# EAGLE board mav_nus_breakout_4xmulti (EAGLE 7.7.0)
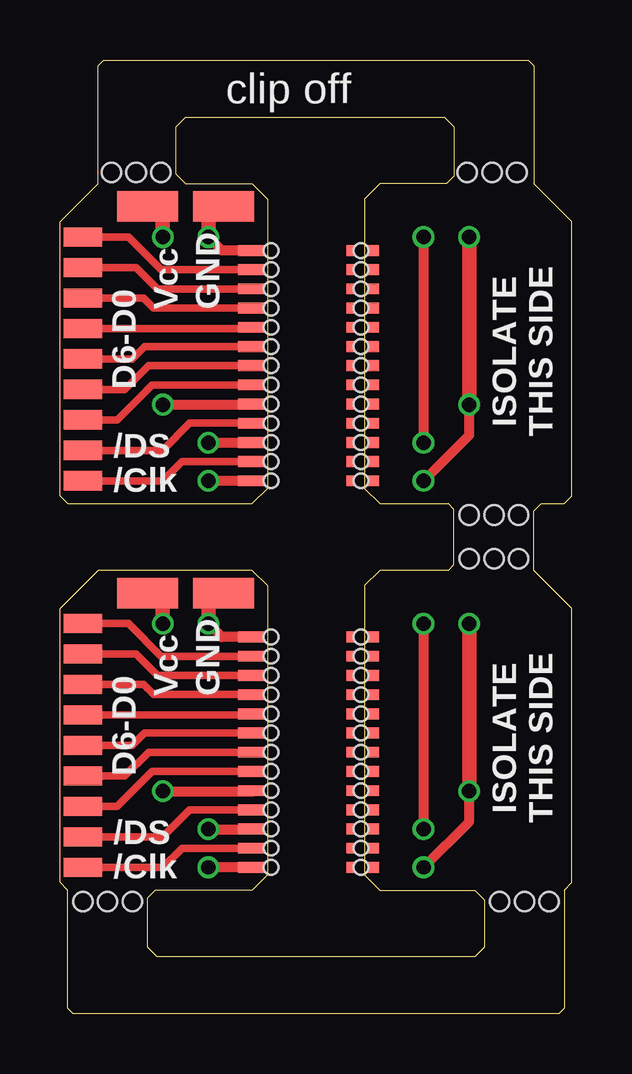
[diagram p0: board, top side]
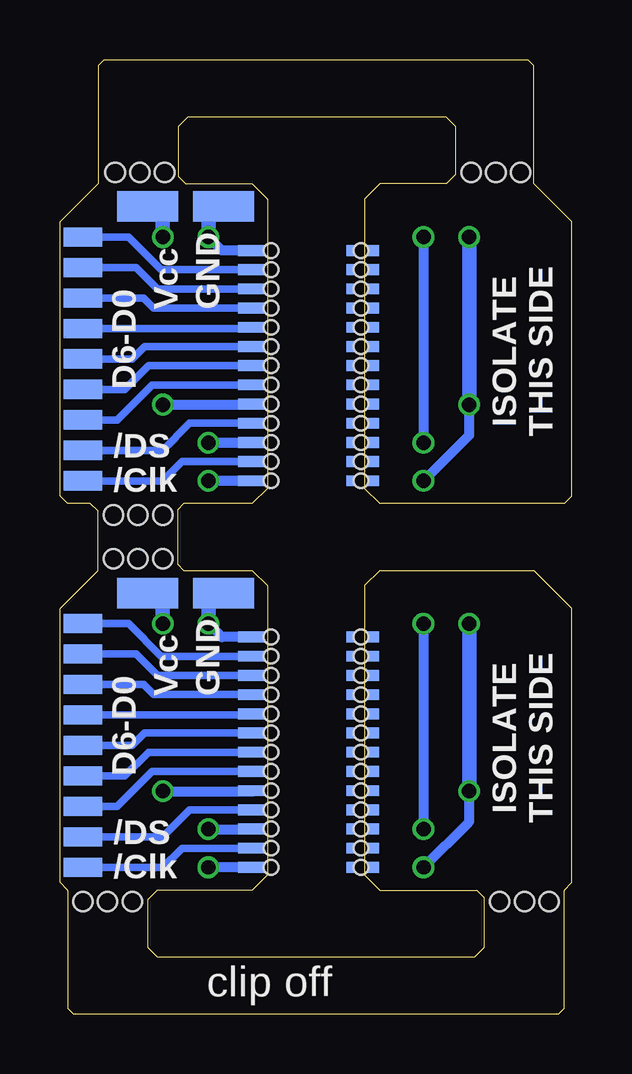
[diagram p1: board, bottom side, seen from below]

Size 21.35 x 39.77 mm. Coordinates in mm from the lower left corner, seen from the top.
Outline: 0,5.48 0,16.91 1.59,18.49 8.02,18.49 8.65,17.86 8.65,5.79 8.02,5.16 3.97,5.16 3.65,4.84 3.65,2.78 4.05,2.38 17.3,2.38 17.7,2.78 17.7,4.76 17.3,5.16 13.34,5.16 12.7,5.79 12.7,17.86 13.34,18.49 16.19,18.49 16.43,18.73 16.43,21.03 16.19,21.27 13.34,21.27 12.7,21.91 12.7,33.97 13.34,34.61 16.11,34.61 16.43,34.93 16.43,36.99 16.03,37.39 5.24,37.39 4.84,36.99 4.84,35 5.24,34.61 8.02,34.61 8.65,33.97 8.65,21.91 8.02,21.27 0.32,21.27 0,21.59 0,33.02 1.59,34.61 1.59,39.53 1.83,39.77 19.53,39.77 19.76,39.53 19.76,34.61 21.35,33.02 21.35,21.59 21.03,21.27 20.08,21.27 19.76,20.96 19.76,18.49 21.35,16.91 21.35,5.48 21.03,5.16 21.03,0.24 20.8,0 0.56,0 0.32,0.24 0.32,5.16 0,5.48
Copper layers (1*16): Top 0.035mm / dielectric 1.5mm / Bottom 0.035mm
Design rules "ITEADstudio_DRC": minimum track width 6mil, minimum drill 12mil, track to track 6mil, track to pad 6mil, pad to pad 6mil, via to via 6mil, smd to smd 0mil, copper to edge 10mil, drill to drill 10mil, minimum pad ring 10mil, minimum via ring 6mil, stop-mask expansion 2mil, vias tented up to drill 30mil, thermal gap 10mil
Holes 0.6 mm at 8.8,6.11 8.8,6.91 8.8,7.71 8.8,8.51 8.8,9.31 8.8,10.11 8.8,10.91 8.8,11.71 8.8,12.51 8.8,13.31 8.8,14.11 8.8,14.91 8.8,15.71 12.56,6.11 12.56,6.91 12.56,7.71 12.56,8.51 12.56,9.31 12.56,10.11 12.56,10.91 12.56,11.71 12.56,12.51 12.56,13.31 12.56,14.11 12.56,14.91 12.56,15.71 8.8,22.23 8.8,23.03 8.8,23.82 8.8,24.62 8.8,25.43 8.8,26.23 8.8,27.03 8.8,27.82 8.8,28.62 8.8,29.43 8.8,30.23 8.8,31.03 8.8,31.82 12.56,22.23 12.56,23.03 12.56,23.82 12.56,24.62 12.56,25.43 12.56,26.23 12.56,27.03 12.56,27.82 12.56,28.62 12.56,29.43 12.56,30.23 12.56,31.03 12.56,31.82
Holes 0.8 mm at 0.95,4.68 3.02,4.68 1.98,4.68 18.34,4.68 20.4,4.68 19.37,4.68 17.07,20.8 19.13,20.8 18.1,20.8 17.07,18.97 19.13,18.97 18.1,18.97 2.14,35.08 4.21,35.08 3.17,35.08 16.99,35.08 19.05,35.08 18.02,35.08

## Footprints (pad centres in the part's own frame; a part is rotated, then mirrored left to right if it is on the bottom)
SMD1,27-2,54 = smd 1.27 x 2.54: 1 0,0
SMD0,45-1,35 = smd 1.35 x 0.45: P$1 0,0
SMD0,8-1,6 = smd 0.8 x 1.6: P$1 0,0

## Placement (x,y rotation side)
PAD1  [SMD1,27-2,54]  3.65,17.54 270 top
PAD2  [SMD1,27-2,54]  6.83,17.54 270 top
PAD3  [SMD1,27-2,54]  17.7,17.54 270 bottom
PAD4  [SMD1,27-2,54]  14.53,17.54 270 bottom
PAD5  [SMD1,27-2,54]  3.65,33.66 270 top
PAD6  [SMD1,27-2,54]  6.83,33.66 270 top
PAD7  [SMD1,27-2,54]  17.7,33.66 270 bottom
PAD8  [SMD1,27-2,54]  14.53,33.66 270 bottom
U$1  SMD0,45  [SMD0,45-1,35]  8.1,10.91 0 top
U$2  SMD0,45  [SMD0,45-1,35]  8.1,10.11 0 top
U$3  SMD0,45  [SMD0,45-1,35]  8.1,8.51 0 top
U$4  SMD0,45  [SMD0,45-1,35]  8.1,6.91 0 top
U$5  SMD0,45  [SMD0,45-1,35]  8.1,11.71 0 top
U$6  SMD0,45  [SMD0,45-1,35]  8.1,12.51 0 top
U$7  SMD0,45  [SMD0,45-1,35]  8.1,13.31 0 top
U$8  SMD0,45  [SMD0,45-1,35]  8.1,14.11 0 top
U$9  SMD0,45  [SMD0,45-1,35]  8.1,14.91 0 top
U$10  SMD0,45  [SMD0,45-1,35]  8.1,9.31 0 top
U$11  SMD0,45  [SMD0,45-1,35]  8.1,6.11 0 top
U$12  SMD0,45  [SMD0,45-1,35]  8.1,7.71 0 top
U$13  SMD0,45  [SMD0,45-1,35]  8.1,15.71 0 top
U$14  SMD1  [SMD0,8-1,6]  0.95,9.92 90 top
U$15  SMD1  [SMD0,8-1,6]  0.95,8.65 90 top
U$16  SMD1  [SMD0,8-1,6]  0.95,7.38 90 top
U$17  SMD1  [SMD0,8-1,6]  0.95,6.11 90 top
U$18  SMD1  [SMD0,8-1,6]  0.95,11.19 90 top
U$19  SMD1  [SMD0,8-1,6]  0.95,12.46 90 top
U$20  SMD1  [SMD0,8-1,6]  0.95,13.73 90 top
U$21  SMD1  [SMD0,8-1,6]  0.95,15 90 top
U$22  SMD1  [SMD0,8-1,6]  0.95,16.27 90 top
U$23  SMD0,45  [SMD0,45-1,35]  8.73,6.11 0 bottom
U$24  SMD0,45  [SMD0,45-1,35]  8.73,15.71 0 bottom
U$25  SMD0,45  [SMD0,45-1,35]  8.73,14.91 0 bottom
U$26  SMD0,45  [SMD0,45-1,35]  8.73,14.11 0 bottom
U$27  SMD0,45  [SMD0,45-1,35]  8.73,13.31 0 bottom
U$28  SMD0,45  [SMD0,45-1,35]  8.73,12.51 0 bottom
U$29  SMD0,45  [SMD0,45-1,35]  8.73,11.71 0 bottom
U$30  SMD0,45  [SMD0,45-1,35]  8.73,10.91 0 bottom
U$31  SMD0,45  [SMD0,45-1,35]  8.73,10.11 0 bottom
U$32  SMD0,45  [SMD0,45-1,35]  8.73,9.31 0 bottom
U$33  SMD0,45  [SMD0,45-1,35]  8.73,8.51 0 bottom
U$34  SMD0,45  [SMD0,45-1,35]  8.73,7.71 0 bottom
U$35  SMD0,45  [SMD0,45-1,35]  8.73,6.91 0 bottom
U$36  SMD0,45  [SMD0,45-1,35]  13.26,10.91 0 bottom
U$37  SMD0,45  [SMD0,45-1,35]  13.26,9.31 0 bottom
U$38  SMD0,45  [SMD0,45-1,35]  13.26,6.11 0 bottom
U$39  SMD0,45  [SMD0,45-1,35]  13.26,7.71 0 bottom
U$40  SMD0,45  [SMD0,45-1,35]  13.26,15.71 0 bottom
U$41  SMD1  [SMD0,8-1,6]  20.4,9.92 90 bottom
U$42  SMD1  [SMD0,8-1,6]  20.4,8.65 90 bottom
U$43  SMD1  [SMD0,8-1,6]  20.4,7.38 90 bottom
U$44  SMD1  [SMD0,8-1,6]  20.4,6.11 90 bottom
U$45  SMD1  [SMD0,8-1,6]  20.4,11.19 90 bottom
U$46  SMD1  [SMD0,8-1,6]  20.4,12.46 90 bottom
U$47  SMD0,45  [SMD0,45-1,35]  13.26,10.11 0 bottom
U$48  SMD1  [SMD0,8-1,6]  20.4,13.73 90 bottom
U$49  SMD1  [SMD0,8-1,6]  20.4,15 90 bottom
U$50  SMD1  [SMD0,8-1,6]  20.4,16.27 90 bottom
U$51  SMD0,45  [SMD0,45-1,35]  13.26,8.51 0 bottom
U$52  SMD0,45  [SMD0,45-1,35]  13.26,6.91 0 bottom
U$53  SMD0,45  [SMD0,45-1,35]  13.26,11.71 0 bottom
U$54  SMD0,45  [SMD0,45-1,35]  13.26,12.51 0 bottom
U$55  SMD0,45  [SMD0,45-1,35]  13.26,13.31 0 bottom
U$56  SMD0,45  [SMD0,45-1,35]  13.26,14.11 0 bottom
U$57  SMD0,45  [SMD0,45-1,35]  13.26,14.91 0 bottom
U$58  SMD0,45  [SMD0,45-1,35]  12.62,6.11 0 top
U$59  SMD0,45  [SMD0,45-1,35]  12.62,15.71 0 top
U$60  SMD0,45  [SMD0,45-1,35]  12.62,14.91 0 top
U$61  SMD0,45  [SMD0,45-1,35]  12.62,14.11 0 top
U$62  SMD0,45  [SMD0,45-1,35]  12.62,13.31 0 top
U$63  SMD0,45  [SMD0,45-1,35]  12.62,12.51 0 top
U$64  SMD0,45  [SMD0,45-1,35]  12.62,11.71 0 top
U$65  SMD0,45  [SMD0,45-1,35]  12.62,10.91 0 top
U$66  SMD0,45  [SMD0,45-1,35]  12.62,10.11 0 top
U$67  SMD0,45  [SMD0,45-1,35]  12.62,9.31 0 top
U$68  SMD0,45  [SMD0,45-1,35]  12.62,8.51 0 top
U$69  SMD0,45  [SMD0,45-1,35]  12.62,7.71 0 top
U$70  SMD0,45  [SMD0,45-1,35]  12.62,6.91 0 top
U$71  SMD0,45  [SMD0,45-1,35]  8.1,27.03 0 top
U$72  SMD0,45  [SMD0,45-1,35]  8.1,25.43 0 top
U$73  SMD0,45  [SMD0,45-1,35]  8.1,22.23 0 top
U$74  SMD0,45  [SMD0,45-1,35]  8.1,23.82 0 top
U$75  SMD0,45  [SMD0,45-1,35]  8.1,31.82 0 top
U$76  SMD1  [SMD0,8-1,6]  0.95,26.04 90 top
U$77  SMD1  [SMD0,8-1,6]  0.95,24.77 90 top
U$78  SMD1  [SMD0,8-1,6]  0.95,23.5 90 top
U$79  SMD1  [SMD0,8-1,6]  0.95,22.23 90 top
U$80  SMD1  [SMD0,8-1,6]  0.95,27.3 90 top
U$81  SMD1  [SMD0,8-1,6]  0.95,28.57 90 top
U$82  SMD0,45  [SMD0,45-1,35]  8.1,26.23 0 top
U$83  SMD1  [SMD0,8-1,6]  0.95,29.85 90 top
U$84  SMD1  [SMD0,8-1,6]  0.95,31.12 90 top
U$85  SMD1  [SMD0,8-1,6]  0.95,32.38 90 top
U$86  SMD0,45  [SMD0,45-1,35]  8.1,24.62 0 top
U$87  SMD0,45  [SMD0,45-1,35]  8.1,23.03 0 top
U$88  SMD0,45  [SMD0,45-1,35]  8.1,27.82 0 top
U$89  SMD0,45  [SMD0,45-1,35]  8.1,28.62 0 top
U$90  SMD0,45  [SMD0,45-1,35]  8.1,29.43 0 top
U$91  SMD0,45  [SMD0,45-1,35]  8.1,30.23 0 top
U$92  SMD0,45  [SMD0,45-1,35]  8.1,31.03 0 top
U$93  SMD0,45  [SMD0,45-1,35]  8.73,22.23 0 bottom
U$94  SMD0,45  [SMD0,45-1,35]  8.73,31.82 0 bottom
U$95  SMD0,45  [SMD0,45-1,35]  8.73,31.03 0 bottom
U$96  SMD0,45  [SMD0,45-1,35]  8.73,30.23 0 bottom
U$97  SMD0,45  [SMD0,45-1,35]  8.73,29.43 0 bottom
U$98  SMD0,45  [SMD0,45-1,35]  8.73,28.62 0 bottom
U$99  SMD0,45  [SMD0,45-1,35]  8.73,27.82 0 bottom
U$100  SMD0,45  [SMD0,45-1,35]  8.73,27.03 0 bottom
U$101  SMD0,45  [SMD0,45-1,35]  8.73,26.23 0 bottom
U$102  SMD0,45  [SMD0,45-1,35]  8.73,25.43 0 bottom
U$103  SMD0,45  [SMD0,45-1,35]  8.73,24.62 0 bottom
U$104  SMD0,45  [SMD0,45-1,35]  8.73,23.82 0 bottom
U$105  SMD0,45  [SMD0,45-1,35]  8.73,23.03 0 bottom
U$106  SMD0,45  [SMD0,45-1,35]  13.26,27.03 0 bottom
U$107  SMD0,45  [SMD0,45-1,35]  13.26,25.43 0 bottom
U$108  SMD0,45  [SMD0,45-1,35]  13.26,22.23 0 bottom
U$109  SMD0,45  [SMD0,45-1,35]  13.26,23.82 0 bottom
U$110  SMD0,45  [SMD0,45-1,35]  13.26,31.82 0 bottom
U$111  SMD1  [SMD0,8-1,6]  20.4,26.04 90 bottom
U$112  SMD1  [SMD0,8-1,6]  20.4,24.77 90 bottom
U$113  SMD1  [SMD0,8-1,6]  20.4,23.5 90 bottom
U$114  SMD1  [SMD0,8-1,6]  20.4,22.23 90 bottom
U$115  SMD1  [SMD0,8-1,6]  20.4,27.3 90 bottom
U$116  SMD1  [SMD0,8-1,6]  20.4,28.57 90 bottom
U$117  SMD0,45  [SMD0,45-1,35]  13.26,26.23 0 bottom
U$118  SMD1  [SMD0,8-1,6]  20.4,29.85 90 bottom
U$119  SMD1  [SMD0,8-1,6]  20.4,31.12 90 bottom
U$120  SMD1  [SMD0,8-1,6]  20.4,32.38 90 bottom
U$121  SMD0,45  [SMD0,45-1,35]  13.26,24.62 0 bottom
U$122  SMD0,45  [SMD0,45-1,35]  13.26,23.03 0 bottom
U$123  SMD0,45  [SMD0,45-1,35]  13.26,27.82 0 bottom
U$124  SMD0,45  [SMD0,45-1,35]  13.26,28.62 0 bottom
U$125  SMD0,45  [SMD0,45-1,35]  13.26,29.43 0 bottom
U$126  SMD0,45  [SMD0,45-1,35]  13.26,30.23 0 bottom
U$127  SMD0,45  [SMD0,45-1,35]  13.26,31.03 0 bottom
U$128  SMD0,45  [SMD0,45-1,35]  12.62,22.23 0 top
U$129  SMD0,45  [SMD0,45-1,35]  12.62,31.82 0 top
U$130  SMD0,45  [SMD0,45-1,35]  12.62,31.03 0 top
U$131  SMD0,45  [SMD0,45-1,35]  12.62,30.23 0 top
U$132  SMD0,45  [SMD0,45-1,35]  12.62,29.43 0 top
U$133  SMD0,45  [SMD0,45-1,35]  12.62,28.62 0 top
U$134  SMD0,45  [SMD0,45-1,35]  12.62,27.82 0 top
U$135  SMD0,45  [SMD0,45-1,35]  12.62,27.03 0 top
U$136  SMD0,45  [SMD0,45-1,35]  12.62,26.23 0 top
U$137  SMD0,45  [SMD0,45-1,35]  12.62,25.43 0 top
U$138  SMD0,45  [SMD0,45-1,35]  12.62,24.62 0 top
U$139  SMD0,45  [SMD0,45-1,35]  12.62,23.82 0 top
U$140  SMD0,45  [SMD0,45-1,35]  12.62,23.03 0 top

## Library data of the parts
PAD1-PAD8 U$1-U$140 = wirepad

## Nets
N$1: U$1.P$1 U$14.P$1
N$2: U$2.P$1 U$15.P$1
N$3: U$3.P$1 U$16.P$1
N$4: U$4.P$1 U$17.P$1
N$5: U$5.P$1 U$18.P$1
N$6: U$6.P$1 U$19.P$1
N$7: U$7.P$1 U$20.P$1
N$8: U$8.P$1 U$21.P$1
N$9: U$9.P$1 U$22.P$1
N$10: PAD1.1 U$10.P$1 U$11.P$1
N$11: PAD2.1 U$12.P$1 U$13.P$1
N$12: U$36.P$1 U$41.P$1
N$13: U$42.P$1 U$47.P$1
N$14: U$43.P$1 U$51.P$1
N$15: U$44.P$1 U$52.P$1
N$16: U$45.P$1 U$53.P$1
N$17: U$46.P$1 U$54.P$1
N$18: U$48.P$1 U$55.P$1
N$19: U$49.P$1 U$56.P$1
N$20: U$50.P$1 U$57.P$1
N$21: PAD3.1 U$37.P$1 U$38.P$1
N$22: PAD4.1 U$39.P$1 U$40.P$1
N$23: U$71.P$1 U$76.P$1
N$24: U$77.P$1 U$82.P$1
N$25: U$78.P$1 U$86.P$1
N$26: U$79.P$1 U$87.P$1
N$27: U$80.P$1 U$88.P$1
N$28: U$81.P$1 U$89.P$1
N$29: U$83.P$1 U$90.P$1
N$30: U$84.P$1 U$91.P$1
N$31: U$85.P$1 U$92.P$1
N$32: PAD5.1 U$72.P$1 U$73.P$1
N$33: PAD6.1 U$74.P$1 U$75.P$1
N$34: U$106.P$1 U$111.P$1
N$35: U$112.P$1 U$117.P$1
N$36: U$113.P$1 U$121.P$1
N$37: U$114.P$1 U$122.P$1
N$38: U$115.P$1 U$123.P$1
N$39: U$116.P$1 U$124.P$1
N$40: U$118.P$1 U$125.P$1
N$41: U$119.P$1 U$126.P$1
N$42: U$120.P$1 U$127.P$1
N$43: PAD7.1 U$107.P$1 U$108.P$1
N$44: PAD8.1 U$109.P$1 U$110.P$1

## Tracks (layer width: path | path; a pad name or v marks a point on that pad's centre or on a via)
N$1
  Top 0.305: U$1.P$1 3.69,10.91 2.7,9.92 U$14.P$1
N$2
  Top 0.305: U$15.P$1 2.38,8.65 3.84,10.11 U$2.P$1
N$3
  Top 0.305: U$3.P$1 5.42,8.51 4.29,7.38 U$16.P$1
N$4
  Top 0.305: U$4.P$1 5.09,6.91 4.29,6.11 U$17.P$1
N$5
  Top 0.305: U$5.P$1 3.54,11.71 3.02,11.19 U$18.P$1
N$6
  Top 0.254: 8.05,12.46 U$6.P$1
  Top 0.305: U$19.P$1 8.05,12.46
N$7
  Top 0.305: U$7.P$1 3.91,13.31 3.49,13.73 U$20.P$1
N$8
  Top 0.305: U$8.P$1 4.07,14.11 3.17,15 U$21.P$1
N$9
  Top 0.305: U$9.P$1 4.22,14.91 2.86,16.27 U$22.P$1
N$10  (via drill 0.6)
  Top 0.356: 8.07,9.29 U$10.P$1
  Top 0.406: U$11.P$1 v6.19,6.11 | v4.29,9.29 8.07,9.29 | 4.29,17.54 PAD1.1
  Top 0.61: v4.29,16.27 4.29,17.54
  Bottom 0.406: v6.19,6.11 4.29,8.02 v4.29,9.29
  Bottom 0.61: v4.29,9.29 v4.29,16.27
N$11  (via drill 0.6)
  Top 0.356: 8.08,7.7 U$12.P$1 | 6.19,17.54 PAD2.1
  Top 0.406: U$13.P$1 6.75,15.71 v6.19,16.27 | v6.19,7.7 8.08,7.7
  Top 0.61: v6.19,16.27 6.19,17.54
  Bottom 0.406: v6.19,16.27 v6.19,7.7
N$12
  Bottom 0.305: U$36.P$1 17.66,10.91 18.65,9.92 U$41.P$1
N$13
  Bottom 0.305: U$42.P$1 18.97,8.65 17.51,10.11 U$47.P$1
N$14
  Bottom 0.305: U$51.P$1 15.94,8.51 17.07,7.38 U$43.P$1
N$15
  Bottom 0.305: U$52.P$1 16.27,6.91 17.07,6.11 U$44.P$1
N$16
  Bottom 0.305: U$53.P$1 17.82,11.71 18.34,11.19 U$45.P$1
N$17
  Bottom 0.254: 13.31,12.46 U$54.P$1
  Bottom 0.305: U$46.P$1 13.31,12.46
N$18
  Bottom 0.305: U$55.P$1 17.44,13.31 17.86,13.73 U$48.P$1
N$19
  Bottom 0.305: U$56.P$1 17.29,14.11 18.18,15 U$49.P$1
N$20
  Bottom 0.305: U$57.P$1 17.13,14.91 18.49,16.27 U$50.P$1
N$21  (via drill 0.6)
  Top 0.406: v15.16,6.11 17.07,8.02 v17.07,9.29
  Top 0.61: v17.07,9.29 v17.07,16.27
  Bottom 0.356: 13.28,9.29 U$37.P$1
  Bottom 0.406: U$38.P$1 v15.16,6.11 | v17.07,9.29 13.28,9.29 | 17.07,17.54 PAD3.1
  Bottom 0.61: v17.07,16.27 17.07,17.54
N$22  (via drill 0.6)
  Top 0.406: v15.16,16.27 v15.16,7.7
  Bottom 0.356: U$39.P$1 | 15.16,17.54 PAD4.1
  Bottom 0.406: U$40.P$1 14.6,15.71 v15.16,16.27 | v15.16,7.7 U$39.P$1
  Bottom 0.61: v15.16,16.27 15.16,17.54
N$23
  Top 0.305: U$71.P$1 3.69,27.03 2.7,26.04 U$76.P$1
N$24
  Top 0.305: U$77.P$1 2.38,24.77 3.84,26.23 U$82.P$1
N$25
  Top 0.305: U$86.P$1 5.42,24.63 4.29,23.5 U$78.P$1
N$26
  Top 0.305: U$87.P$1 5.09,23.03 4.29,22.23 U$79.P$1
N$27
  Top 0.305: U$88.P$1 3.54,27.83 3.02,27.31 U$80.P$1
N$28
  Top 0.254: 8.05,28.58 U$89.P$1
  Top 0.305: U$81.P$1 8.05,28.58
N$29
  Top 0.305: U$90.P$1 3.91,29.43 3.49,29.85 U$83.P$1
N$30
  Top 0.305: U$91.P$1 4.07,30.23 3.17,31.12 U$84.P$1
N$31
  Top 0.305: U$92.P$1 4.22,31.03 2.86,32.39 U$85.P$1
N$32  (via drill 0.6)
  Top 0.356: 8.07,25.4 U$72.P$1
  Top 0.406: U$73.P$1 v6.19,22.23 | v4.29,25.4 8.07,25.4 | 4.29,33.66 PAD5.1
  Top 0.61: v4.29,32.39 4.29,33.66
  Bottom 0.406: v6.19,22.23 4.29,24.13 v4.29,25.4
  Bottom 0.61: v4.29,25.4 v4.29,32.39
N$33  (via drill 0.6)
  Top 0.356: 8.08,23.81 U$74.P$1 | 6.19,33.66 PAD6.1
  Top 0.406: U$75.P$1 6.75,31.83 v6.19,32.39 | v6.19,23.81 8.08,23.81
  Top 0.61: v6.19,32.39 6.19,33.66
  Bottom 0.406: v6.19,32.39 v6.19,23.81
N$34
  Bottom 0.305: U$106.P$1 17.66,27.03 18.65,26.04 U$111.P$1
N$35
  Bottom 0.305: U$112.P$1 18.97,24.77 17.51,26.23 U$117.P$1
N$36
  Bottom 0.305: U$121.P$1 15.94,24.63 17.07,23.5 U$113.P$1
N$37
  Bottom 0.305: U$122.P$1 16.27,23.03 17.07,22.23 U$114.P$1
N$38
  Bottom 0.305: U$123.P$1 17.82,27.83 18.34,27.31 U$115.P$1
N$39
  Bottom 0.254: 13.31,28.58 U$124.P$1
  Bottom 0.305: U$116.P$1 13.31,28.58
N$40
  Bottom 0.305: U$125.P$1 17.44,29.43 17.86,29.85 U$118.P$1
N$41
  Bottom 0.305: U$126.P$1 17.29,30.23 18.18,31.12 U$119.P$1
N$42
  Bottom 0.305: U$127.P$1 17.13,31.03 18.49,32.39 U$120.P$1
N$43  (via drill 0.6)
  Top 0.406: v15.16,22.23 17.07,24.13 v17.07,25.4
  Top 0.61: v17.07,25.4 v17.07,32.39
  Bottom 0.356: 13.28,25.4 U$107.P$1
  Bottom 0.406: U$108.P$1 v15.16,22.23 | v17.07,25.4 13.28,25.4 | 17.07,33.66 PAD7.1
  Bottom 0.61: v17.07,32.39 17.07,33.66
N$44  (via drill 0.6)
  Top 0.406: v15.16,32.39 v15.16,23.81
  Bottom 0.356: 13.27,23.81 U$109.P$1 | 15.16,33.66 PAD8.1
  Bottom 0.406: U$110.P$1 14.6,31.83 v15.16,32.39 | v15.16,23.81 13.27,23.81
  Bottom 0.61: v15.16,32.39 15.16,33.66

## Text on the board
tNames: clip off | Vcc | GND | ISOLATE / THIS SIDE | D6-D0 | /DS | /Clk | Vcc | GND | ISOLATE / THIS SIDE | D6-D0 | /DS | /Clk
bNames: GND | Vcc | ISOLATE / THIS SIDE | D6-D0 | /DS | /Clk | GND | Vcc | ISOLATE / THIS SIDE | D6-D0 | /DS | /Clk | clip off